# EAGLE board ir remote (EAGLE 6.5.0)
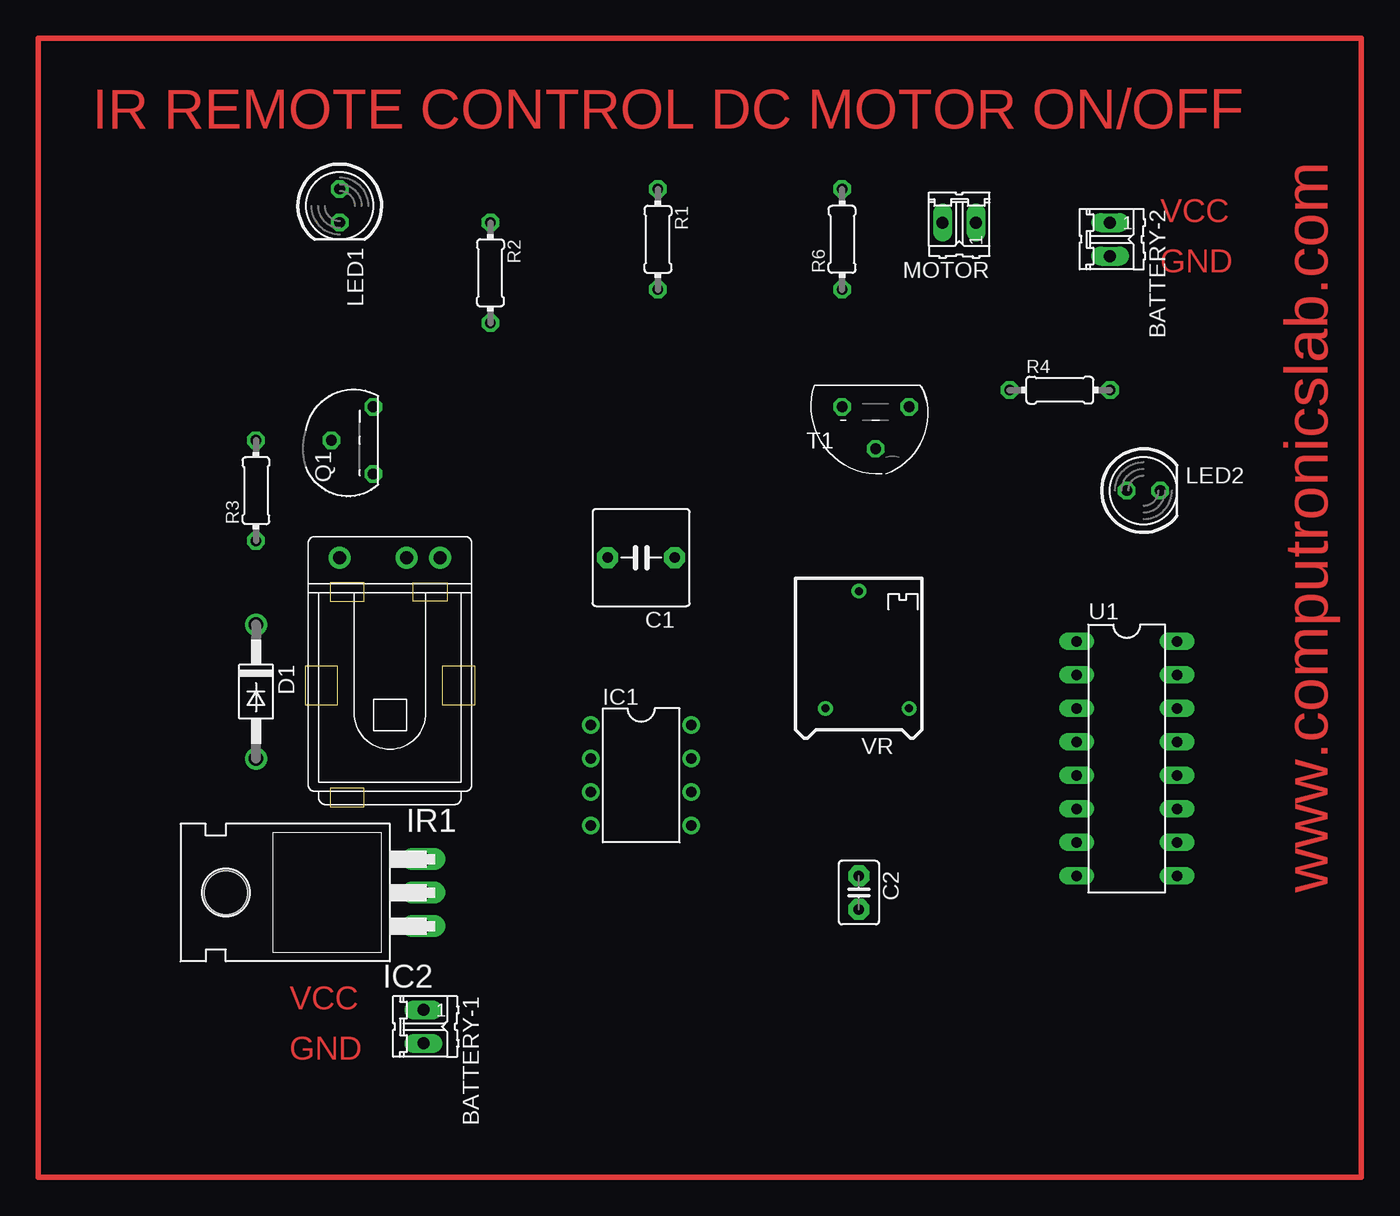
[diagram p0: board, top side]
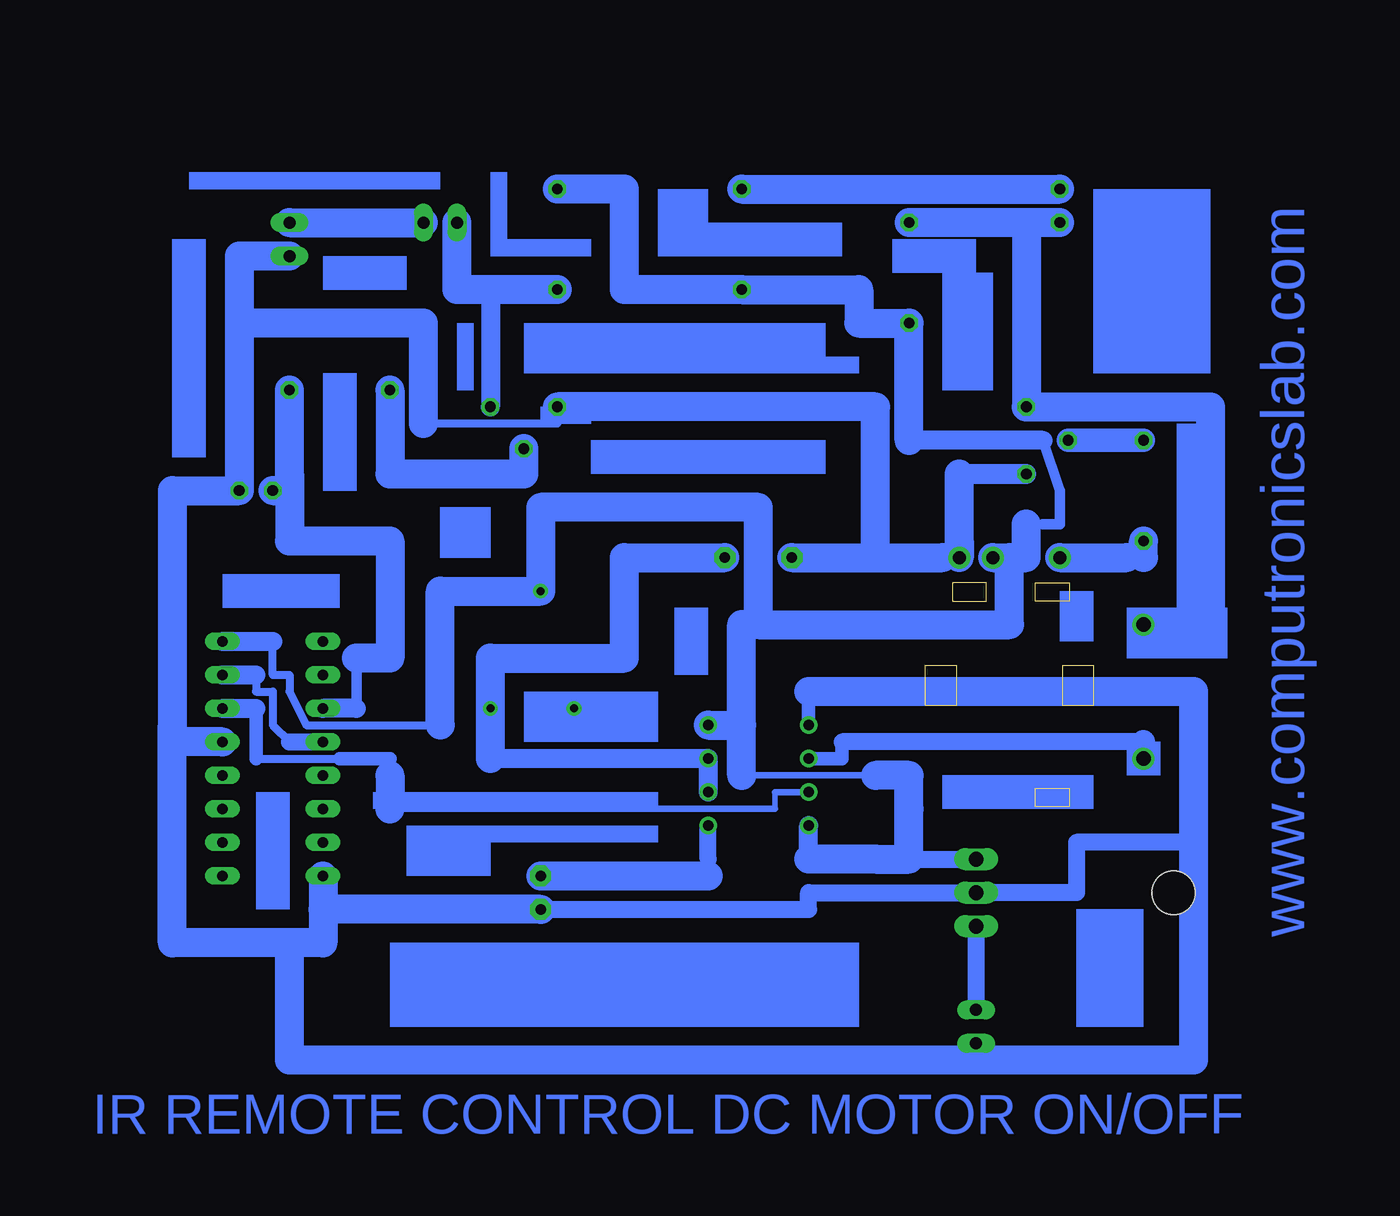
[diagram p1: board, bottom side, seen from below]

Size 12.8 x 17 mm. Coordinates in mm from the lower left corner, seen from the top.
Copper layers (1*16): Top 0.035mm / dielectric 1.5mm / Bottom 0.035mm
Design rules "default": minimum track width 10mil, minimum drill 24mil, track to track 8mil, track to pad 8mil, pad to pad 8mil, via to via 8mil, smd to smd 8mil, copper to edge 40mil, drill to drill 8mil, minimum pad ring 10mil, minimum via ring 8mil, stop-mask expansion 4mil, vias tented up to drill 0mil, thermal gap 10mil

## Footprints (pad centres in the part's own frame; a part is rotated, then mirrored left to right if it is on the bottom)
02P = drill 0.914 long: 1 -1.27,0; 2 1.27,0
C5B7.2 = drill 0.813 pad 1.6 octagon: 1 -2.54,0; 2 2.54,0
C2.5-3 = drill 0.813 pad 1.6 octagon: 1 -1.27,0; 2 1.27,0
DO41-10 = drill 1.118: A 5.08,0; C -5.08,0
DIL08 = drill 0.813 pad 1.27: 1 -3.81,-3.81; 2 -1.27,-3.81; 3 1.27,-3.81; 4 3.81,-3.81; 5 3.81,3.81; 6 1.27,3.81; 7 -1.27,3.81; 8 -3.81,3.81
TO220H = drill 1.118 long: 1 -2.54,-10.16; 2 0,-10.16; 3 2.54,-10.16 | hole 3.302: 0,4.826
TSOP17_TB1 = drill 1 pad 1.676: GND 0,-3.81; VO 0,3.81; VS 0,-1.27
LED5MM = drill 0.813 octagon: A -1.27,0; K 1.27,0
TO92 = drill 0.813 octagon: 1 2.54,-1.27; 2 0,1.905; 3 -2.54,-1.27
0204/7 = drill 0.813 octagon: 1 -3.81,0; 2 3.81,0
DIL16 = drill 0.813 long: 1 -8.89,-3.81; 2 -6.35,-3.81; 3 -3.81,-3.81; 4 -1.27,-3.81; 5 1.27,-3.81; 6 3.81,-3.81; 7 6.35,-3.81; 8 8.89,-3.81; 9 8.89,3.81; 10 6.35,3.81; 11 3.81,3.81; 12 1.27,3.81; 13 -1.27,3.81; 14 -3.81,3.81; 15 -6.35,3.81; 16 -8.89,3.81
RTRIM64P = drill 0.61: 1 -2.54,-3.81; 2 6.35,0; 3 -2.54,2.54

## Placement (x,y rotation side)
BATTERY-1  9V  [02P]  8.94,-16.66 270 top  (outside the outline)
BATTERY-2  [02P]  61.01,43.03 270 top  (outside the outline)
C1  100uf  [C5B7.2]  25.45,18.9 180 top  (outside the outline)
C2  .01uf  [C2.5-3]  41.96,-6.5 270 top  (outside the outline)
D1  1N4007  [DO41-10]  -3.76,8.74 270 top  (outside the outline)
IC1  NE555  [DIL08]  25.45,2.39 270 top  (outside the outline)
IC2  7805T  [TO220H]  -1.22,-6.5 90 top  (outside the outline)
IR1  TSOP1730TB1  [TSOP17_TB1]  6.4,18.9 90 top
LED1  5MM  [LED5MM]  2.59,45.57 270 top  (outside the outline)
LED2  5MM  [LED5MM]  63.55,23.98 0 top  (outside the outline)
MOTOR  [02P]  49.58,44.3 180 top  (outside the outline)
Q1  BC557  [TO92]  3.86,27.79 90 top  (outside the outline)
R1  220E  [0204/7]  26.72,43.03 270 top  (outside the outline)
R2  10K  [0204/7]  14.02,40.49 270 top  (outside the outline)
R3  1K  [0204/7]  -3.76,23.98 90 top  (outside the outline)
R4  220E  [0204/7]  57.2,31.6 0 top  (outside the outline)
R6  10K  [0204/7]  40.69,43.03 90 top  (outside the outline)
T1  BC547  [TO92]  43.23,29.06 180 top  (outside the outline)
U1  IC4017  [DIL16]  62.28,3.66 270 top  (outside the outline)
VR  100K  [RTRIM64P]  41.96,10.01 90 top  (outside the outline)

## Library data of the parts
BATTERY-1 BATTERY-2 MOTOR = con-amp-quick; OC_FARNELL: unknown; OC_NEWARK: unknown
C1 C2 = capacitor-wima
D1 = diode
IC1 = texas; MF: TEXAS INSTRUMENT CONNECTORS; MPN: BQ2000TPN-B5; OC_FARNELL: unknown; OC_NEWARK: 74C7505
IC2 = linear
IR1 = telefunken; OC_FARNELL: unknown; OC_NEWARK: unknown
LED1 LED2 = led
Q1 = transistor-pnp
R1-R4 R6 = eagle-ltspice; SPICEMODEL: NONE; SPICEPREFIX: R
T1 = transistor
U1 = texas; MF: TEXAS INSTRUMENT CONNECTORS; MPN: BQ2054PN; OC_FARNELL: 8407789; OC_NEWARK: 74C7582
VR = resistor

## Nets
N$1: C1.1 IC1.6 IC1.7 VR.1
N$2: LED2.A R4.2 U1.3
N$3: BATTERY-1.2 BATTERY-2.2 C1.2 C2.2 IC1.1 IC2.2 IR1.GND LED2.K Q1.3 T1.1 U1.8 U1.13
N$4: D1.A IC1.2
N$5: IR1.VO R3.1
N$6: Q1.2 R3.2
N$7: C2.1 IC1.5
N$8: U1.4 U1.15
N$9: IC1.4 IC1.8 IC2.3 IR1.VS R1.2 R2.2 R6.2 U1.16 VR.2
N$10: LED1.A R1.1
N$11: D1.C LED1.K Q1.1 R2.1
N$12: R4.1 T1.2
N$13: MOTOR.2 R6.1 T1.3
N$14: BATTERY-2.1 MOTOR.1
N$15: IC1.3 U1.14
N$17: BATTERY-1.1 IC2.1
VSS: U1.12

## Tracks (layer width: path | path; a pad name or v marks a point on that pad's centre or on a via)
N$1
  Bottom 1.422: IC1.6 IC1.7 45.77,3.66
  Bottom 2.184: 45.77,3.66 VR.1 45.77,11.28 35.61,11.28 35.61,18.9 C1.1
N$2
  Bottom 0.254: LED2.A 61.01,25.25
  Bottom 0.813: 55.93,11.28 55.93,7.47
  Bottom 1.422: 55.93,7.47 U1.3
  Bottom 2.184: 55.93,11.28 53.39,11.28 53.39,20.17 61.01,20.17 61.01,25.25 | R4.2 61.01,23.98 LED2.A
N$3
  Bottom 0.254: 11.48,18.9 10.21,20.17 | 40.69,29.06 T1.1 | 50.85,32.87 50.85,31.6 | 64.82,36.68 64.82,32.87 | 58.47,-7.77 U1.8 | 69.9,6.2 69.9,4.93
  Bottom 0.406: -7.57,-19.2 8.94,-19.2
  Bottom 0.61: 40.69,29.06 50.85,29.06
  Bottom 1.016: 21.64,8.74 IC1.1
  Bottom 1.27: 8.94,-19.2 BATTERY-1.2 | -7.57,-2.69 1.32,-2.69 1.32,-6.5 IC2.2 21.64,-6.5 21.64,-7.77 C2.2
  Bottom 1.524: 10.21,25.25 Q1.3
  Bottom 2.184: BATTERY-2.2 64.82,41.76 64.82,32.87 LED2.K 69.9,23.98 69.9,6.2 69.9,-10.31 58.47,-10.31 U1.8 | 10.21,25.25 10.21,20.17 IR1.GND | C1.2 16.56,18.9 | 16.56,18.9 11.48,18.9 | 16.56,18.9 16.56,30.33 T1.1 | 50.85,31.6 50.85,36.68 64.82,36.68 | 50.85,29.06 50.85,32.87 | C2.2 58.47,-7.77 | 21.64,8.74 -7.57,8.74 -7.57,-2.69 -7.57,-19.2 61.01,-19.2 61.01,-10.31 | U1.13 69.9,4.93
N$4
  Bottom 1.016: 19.1,4.93 19.1,3.66 IC1.2
  Bottom 1.27: -3.76,4.93 19.1,4.93
  Bottom 1.778: D1.A -3.76,4.93
N$5
  Bottom 1.778: -2.49,18.9 -3.76,18.9
  Bottom 2.184: -3.76,18.9 R3.1 | IR1.VO -2.49,18.9
N$6
  Bottom 1.778: Q1.2 R3.2
N$7
  Bottom 0.254: 29.26,-5.23 29.26,-3.96
  Bottom 1.27: 29.26,-3.96 IC1.5
  Bottom 2.184: C2.1 29.26,-5.23
N$8
  Bottom 0.61: 63.55,10.01 63.55,8.74 62.28,8.74 62.28,6.2 61.01,4.93
  Bottom 1.27: 61.01,4.93 U1.4
  Bottom 1.422: U1.15 63.55,10.01
N$9
  Bottom 0.254: 26.72,13.82 25.45,13.82 | 6.4,18.9 IR1.VS
  Bottom 0.406: 5.13,21.44 3.86,21.44
  Bottom 0.508: 16.56,2.39 26.72,2.39
  Bottom 0.61: 49.58,6.2 59.74,6.2 61.01,8.74 61.01,10.01 62.28,10.01 62.28,12.55
  Bottom 0.813: 3.86,21.44 2.59,21.44 2.59,23.98 3.86,27.79
  Bottom 1.27: 16.56,-3.96 IC2.3
  Bottom 1.422: U1.16 62.28,12.55 | 21.64,-3.96 IC1.4 | 3.86,27.79 14.02,27.79
  Bottom 2.184: R6.2 35.61,46.84 35.61,39.22 R1.2 17.83,39.22 17.83,36.68 R2.2 14.02,27.79 | 49.58,6.2 49.58,16.36 VR.2 41.96,22.71 25.45,22.71 25.45,13.82 6.4,13.82 6.4,18.9 | 21.64,-3.96 16.56,-3.96 14.02,-3.96 14.02,-0.15 14.02,2.39 16.56,2.39 | 26.72,2.39 26.72,6.2 | 26.72,6.2 26.72,13.82 | IC1.8 26.72,6.2 | IR1.VS 5.13,18.9 5.13,21.44
N$10
  Bottom 2.184: R1.1 LED1.A
N$11
  Bottom 0.254: -8.84,13.82 -7.57,13.82
  Bottom 2.184: 5.13,44.3 Q1.1 -8.84,30.33 -8.84,13.82 | LED1.K 5.13,44.3 | 5.13,44.3 R2.1 | -7.57,13.82 D1.C
N$12
  Bottom 0.254: 43.23,27.79 T1.2
  Bottom 2.184: T1.2 43.23,25.25 53.39,25.25 R4.1
N$13
  Bottom 0.254: 43.23,39.22 45.77,39.22
  Bottom 1.422: 45.77,39.22 T1.3
  Bottom 2.184: R6.1 43.23,39.22 48.31,39.22 MOTOR.2
N$14
  Bottom 2.184: BATTERY-2.1 MOTOR.1
N$15
  Bottom 0.254: 53.39,3.66 53.39,2.39
  Bottom 0.406: 24.18,1.12 24.18,-0.15
  Bottom 0.508: IC1.3 24.18,1.12 | 24.18,-0.15 53.39,-0.15
  Bottom 0.61: 63.55,3.66 57.2,3.66
  Bottom 1.016: 57.2,3.66 53.39,3.66 | 63.55,7.47 63.55,3.66
  Bottom 1.422: U1.14 63.55,7.47
  Bottom 2.184: 53.39,2.39 53.39,-0.15
N$16
  Top 0.406: -20.27,58.27 80.06,58.27 80.06,-28.09 -20.27,-28.09 -20.27,58.27
N$17
  Bottom 1.27: IC2.1 BATTERY-1.1
(copper drawn outside any net)
  shapes: Bottom area x32

## Text on the board
Top: IR REMOTE CONTROL DC MOTOR ON/OFF | VCC | GND | www.computronicslab.com | VCC | GND
Bottom: www.computronicslab.com | IR REMOTE CONTROL DC MOTOR ON/OFF